# Altium PCB BikeTracker.PcbDoc
Units mm, origin at the board's own origin, x right, y up, seen from the top; angles counter-clockwise.
Board outline 53.09 x 65.02 mm, 4 copper layers (Top Layer, Inner Layer 1, Inner Layer 2, Bottom Layer), stack 1.564 mm thick; 30 components, 31 nets, 177 pads, 71 vias.
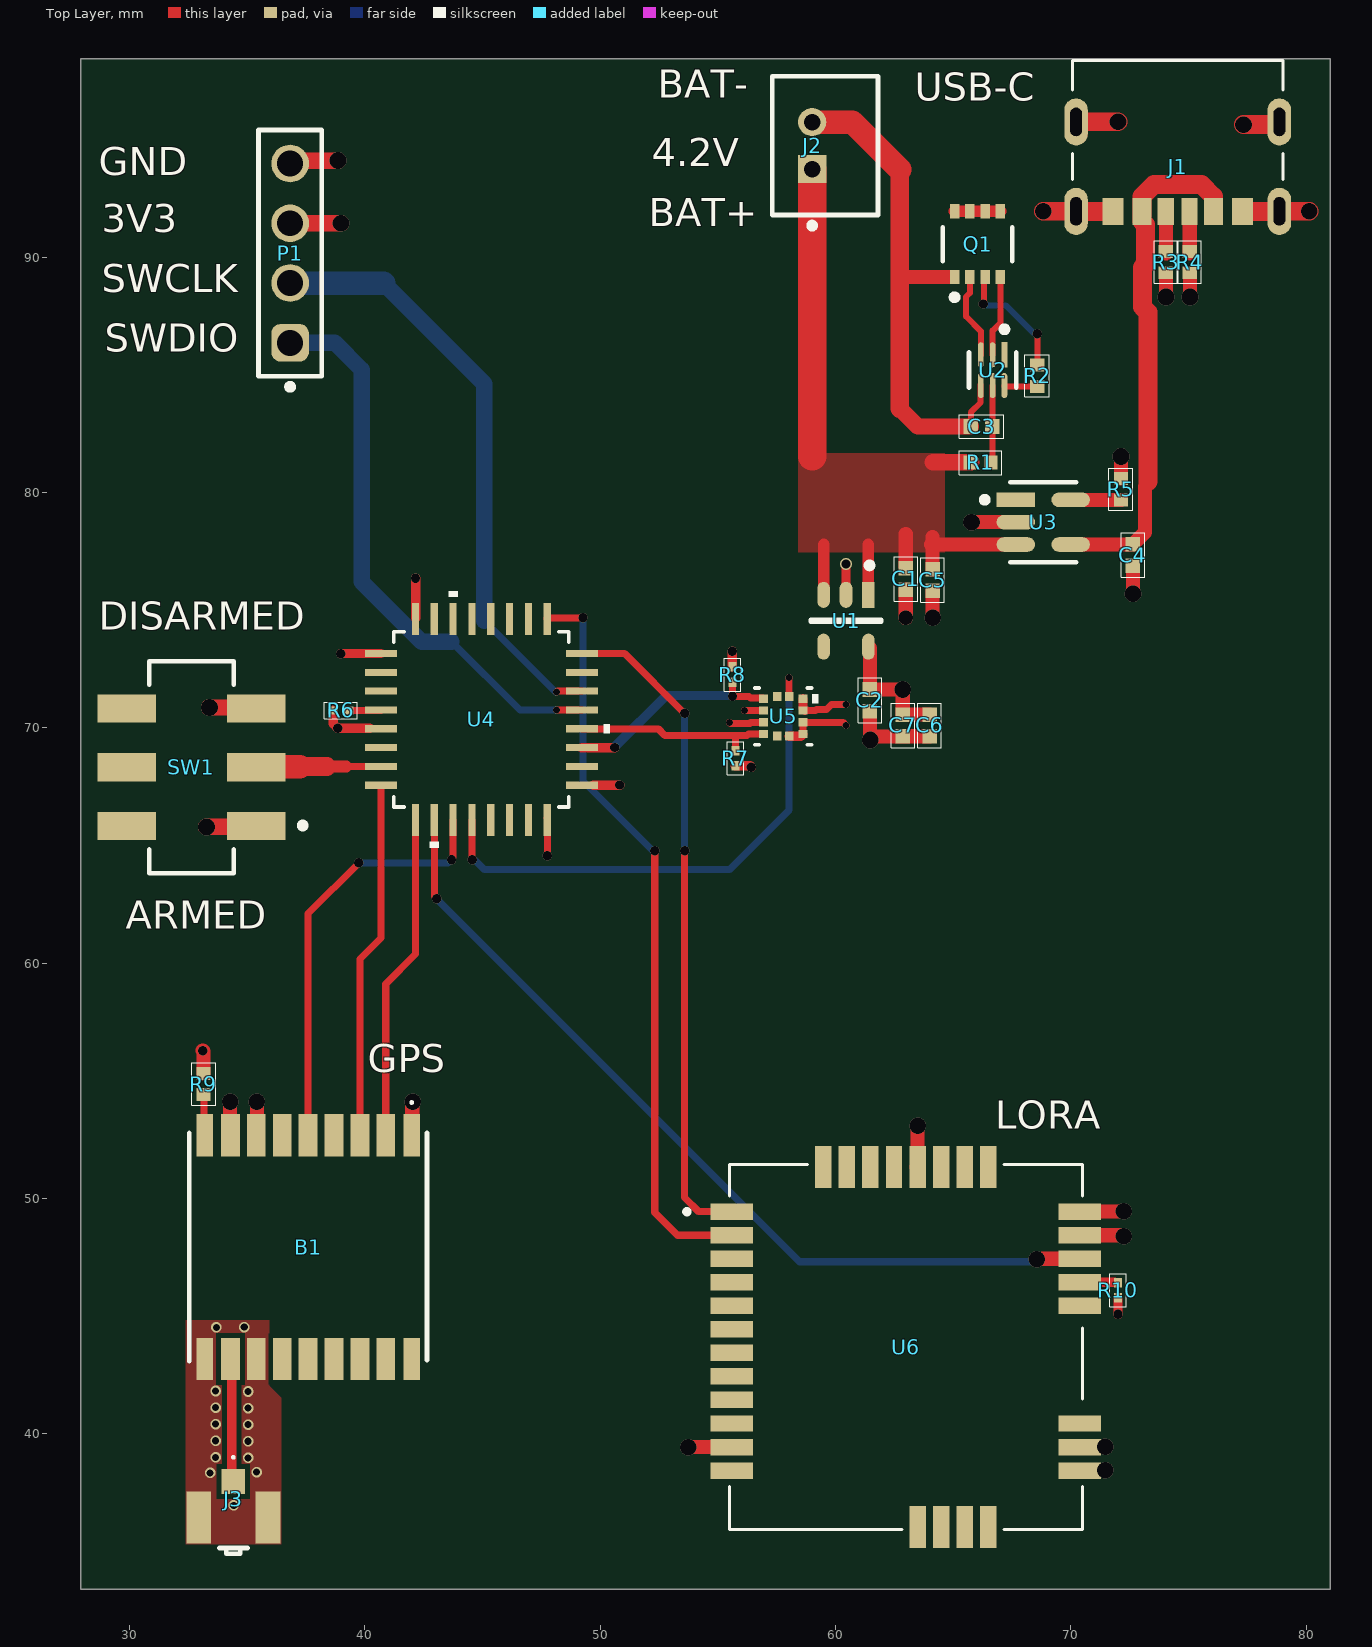
[diagram p0: Top Layer view]
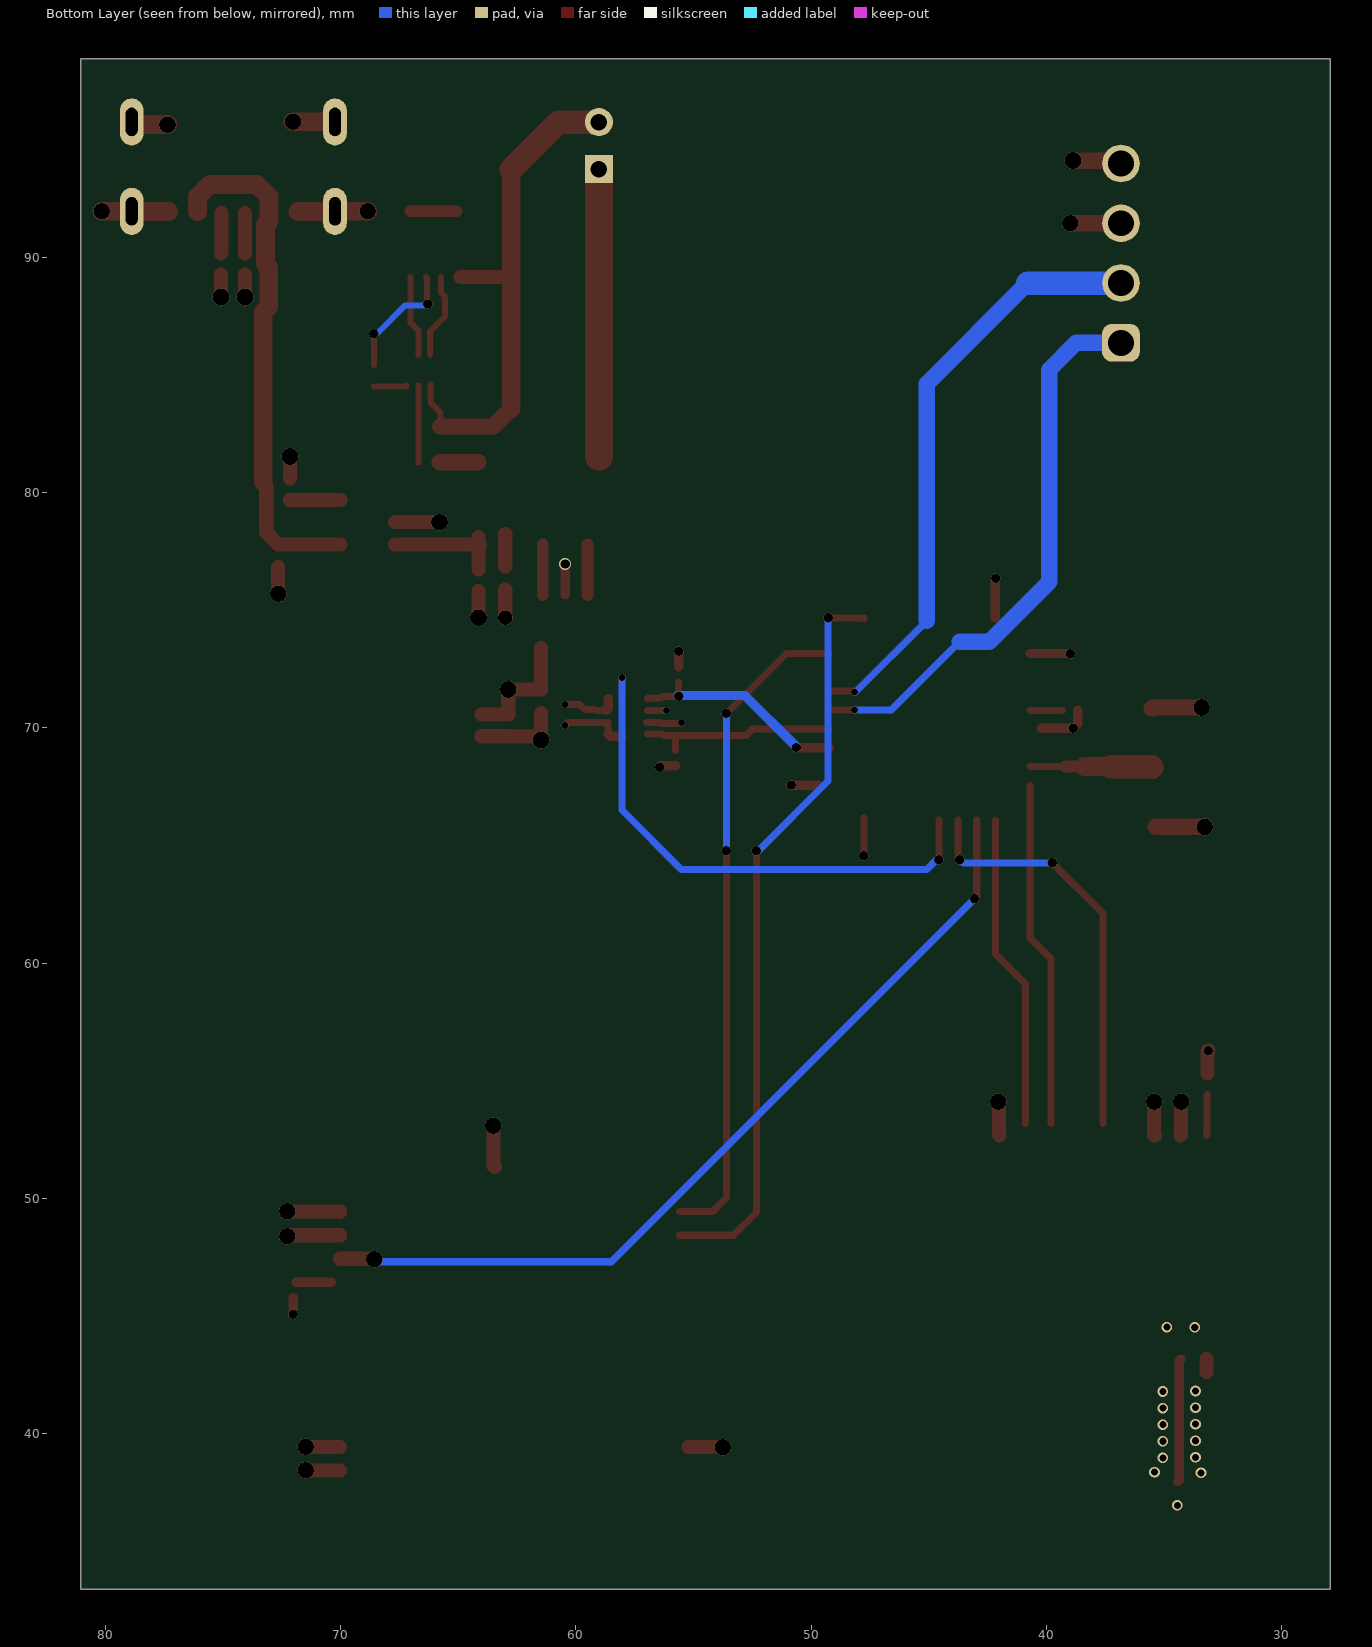
[diagram p1: Bottom Layer view, seen from below]
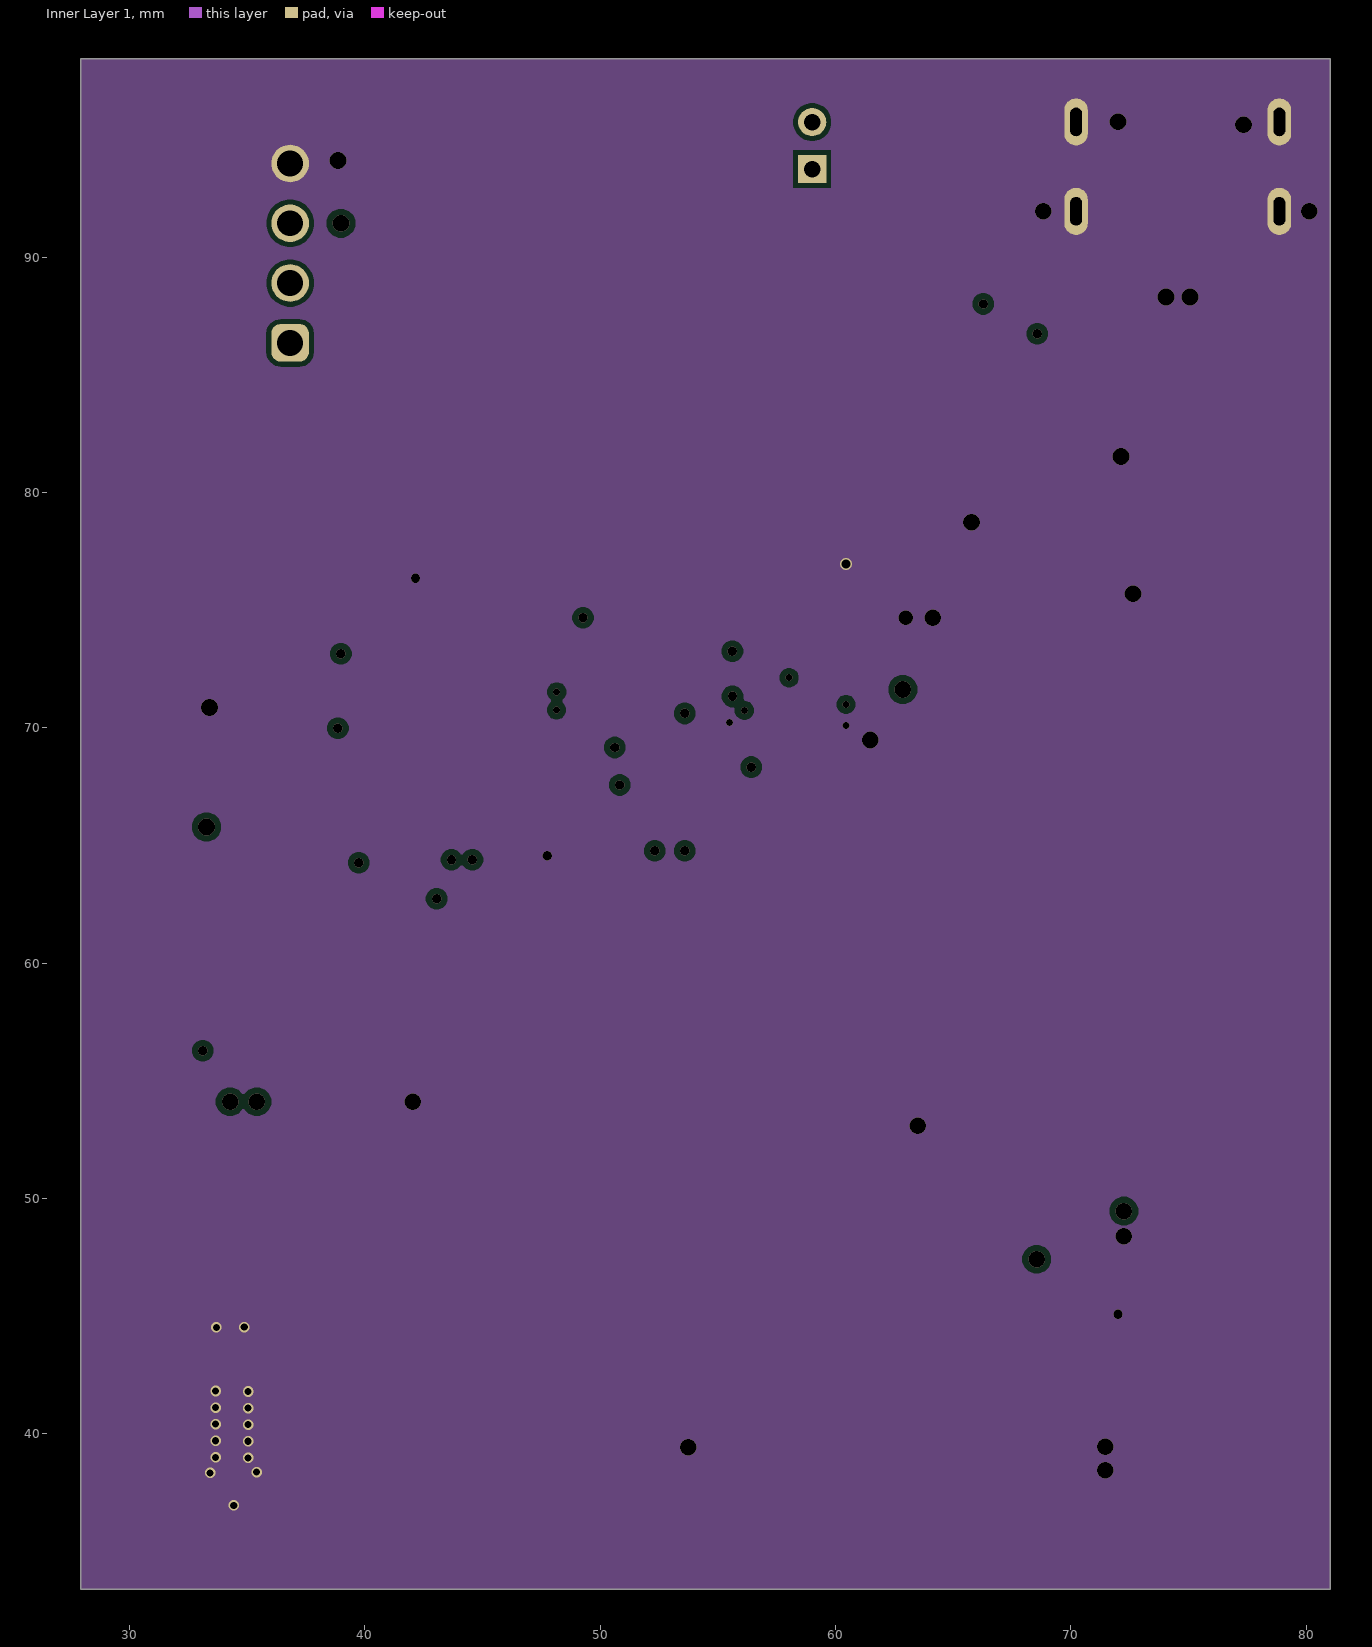
[diagram p2: Inner Layer 1]
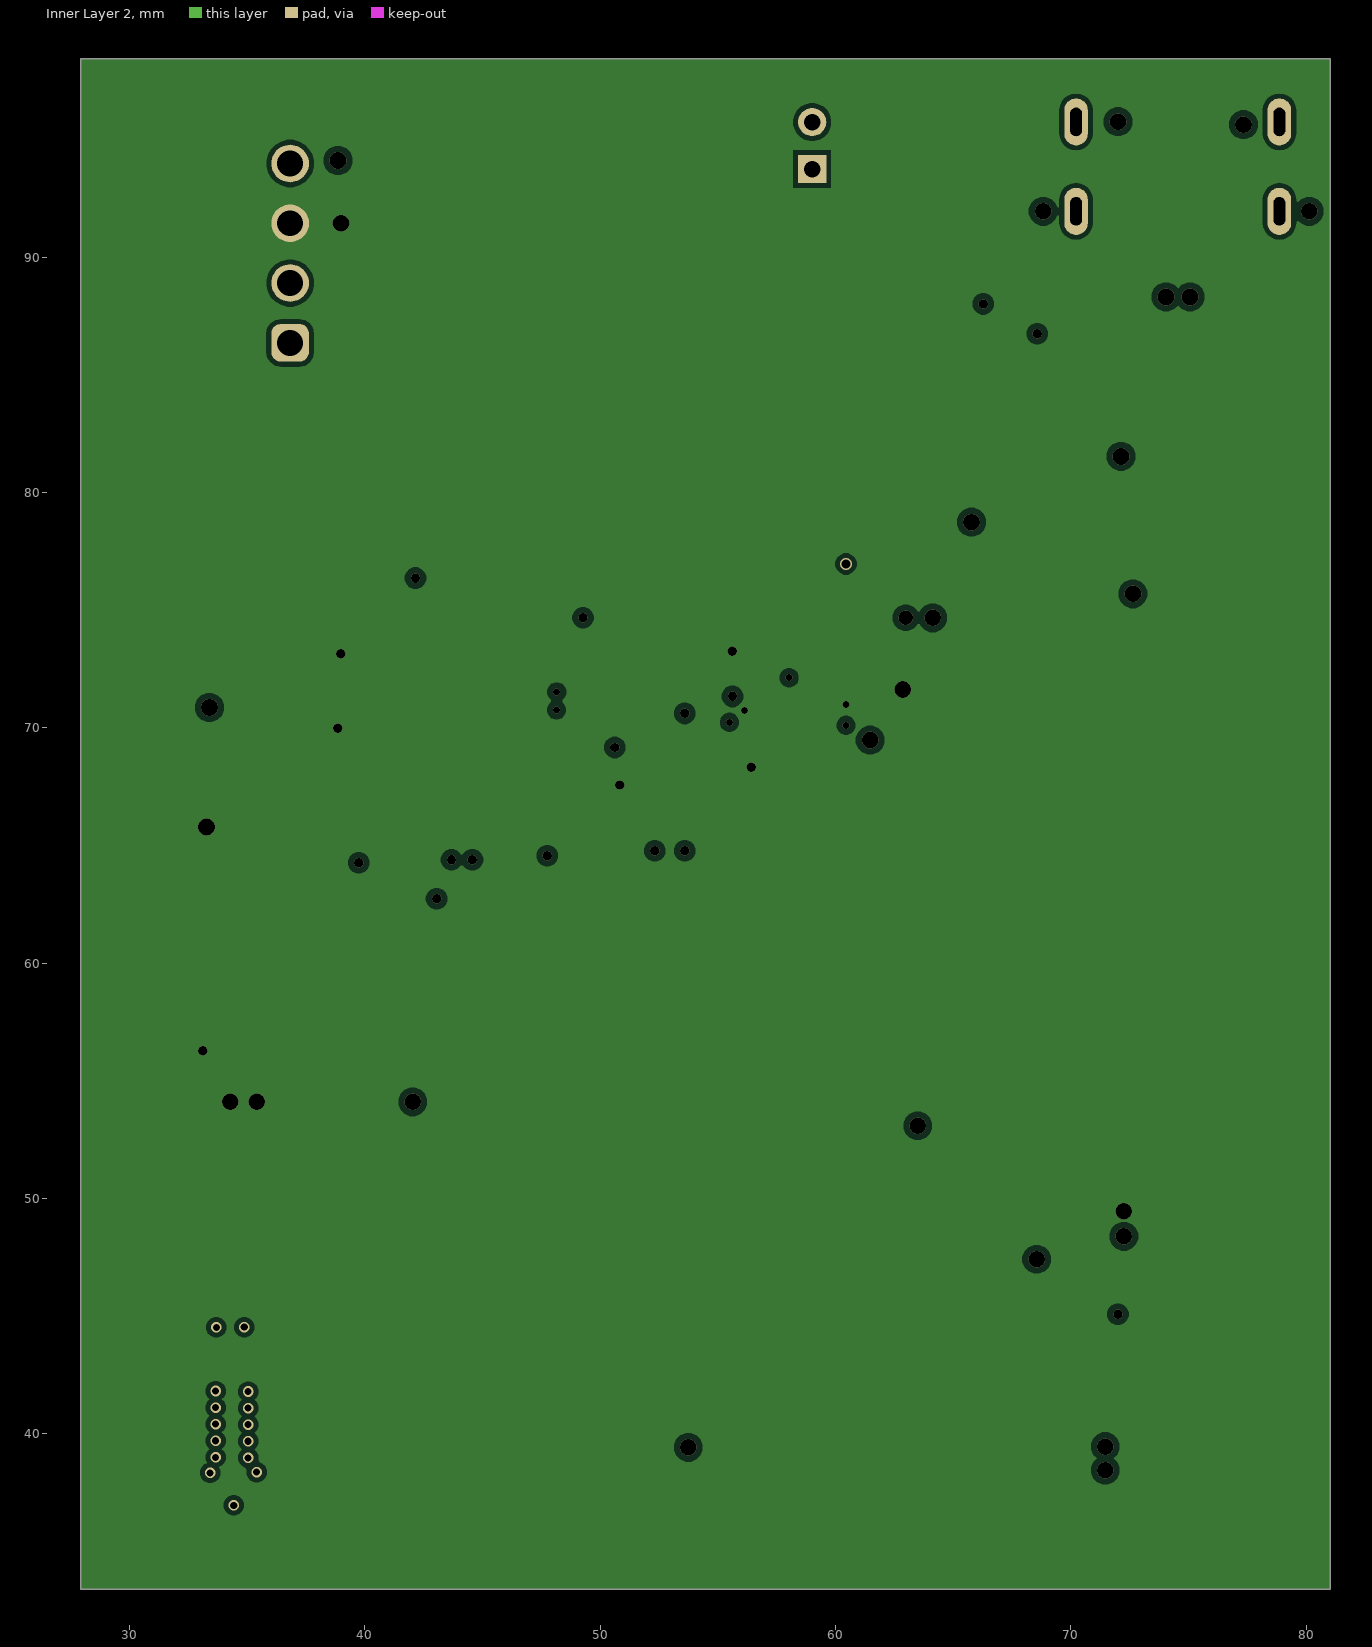
[diagram p3: Inner Layer 2]
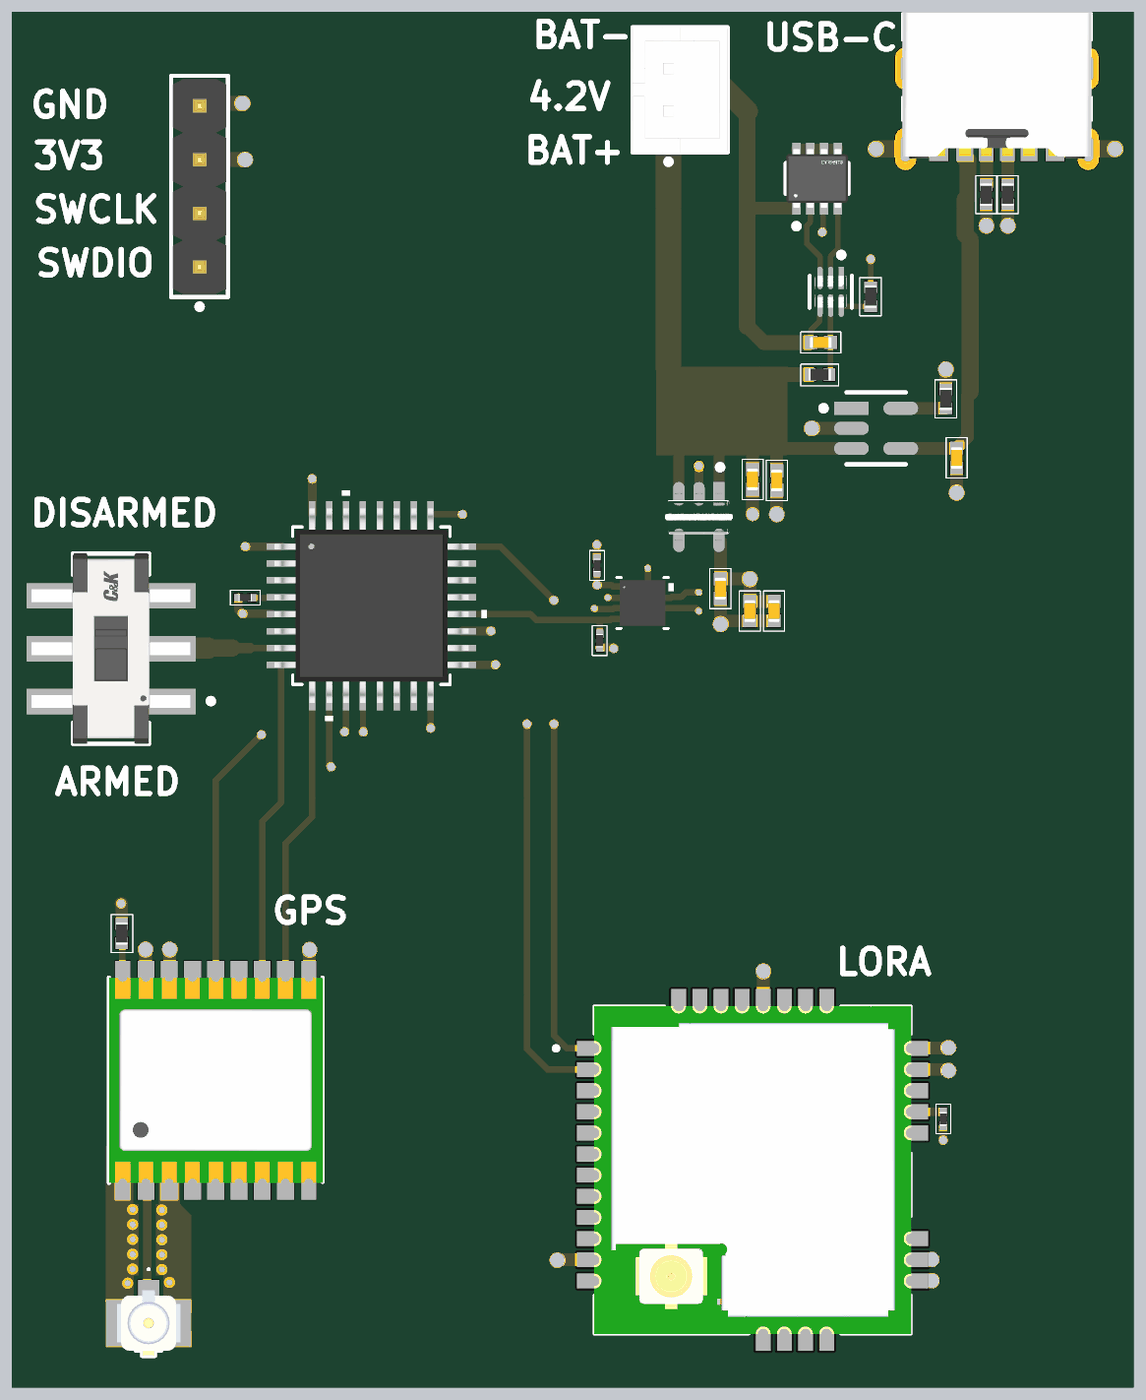
[diagram p4: 3D render of the assembled board from above, using the file's embedded part models]

## Layer stack, top to bottom
Top Solder: solder mask 0.0152, Solder Resist, Dk 3.8
Top Layer: signal copper 0.035
Prepeg 1: prepreg 0.0994, PP-015, Dk 4.1
Inner Layer 1: signal copper 0.0152
Core: core 1.265, FR-4, Dk 4.6
Inner Layer 2: signal copper 0.0152
Prepeg 2: prepreg 0.0994, PP-015, Dk 4.1
Bottom Layer: signal copper 0.035
Bottom Solder: solder mask 0.0152, Solder Resist, Dk 3.8

## Board outline
27.94,33.401 81.026,33.401 81.026,98.425 27.94,98.425

## Design rules (kind name [scope] priority, off if disabled: settings)
Clearance "Stitching No Net" [IsStitchingVia and InNet('No Net') vs (IsVia and (Not IsStitchingVia)) Or IsPad] p1: gap=0.127 ignorepadtopadclearanceinfootprint=FALSE
Clearance [All] p2: gap=0.2 ignorepadtopadclearanceinfootprint=TRUE except(0.102: Arc-Text Track-Text SMDPad-Text THPad-Text Fill-Text Poly-Text Region-Text Text-Text; 0.114: Arc-Arc Arc-Track Arc-SMDPad Arc-Via Track-Track Track-SMDPad Track-Via; 0.127: Via-Text; 0.152: Arc-THPad Track-THPad SMDPad-SMDPad SMDPad-THPad SMDPad-Via THPad-THPad THPad-Via Via-Via; 0.25: Arc-Hole Track-Hole SMDPad-Hole THPad-Hole Via-Hole Fill-Hole Poly-Hole Region-Hole Text-Hole)
ComponentClearance [All] p1: gap=0 collisioncheckmode=3 verticalgap=0 showdistances=FALSE
DiffPairsRouting DIFF90 [InDifferentialPairClass('All Differential Pairs')] p1: maxlimit=0.254 minlimit=0.15 mostfreqgap=0.254 toplayer_maxgap=0.15 toplayer_prefgap=0.15 toplayer_minwidth=0.141 toplayer_maxwidth=0.141 toplayer_prefwidth=0.141 midlayer1_minwidth=0.381 midlayer1_maxwidth=0.381 midlayer1_prefwidth=0.381 midlayer2_mingap=0.25 midlayer2_maxgap=0.25 midlayer2_prefgap=0.25 midlayer2_minwidth=0.139 midlayer2_maxwidth=0.139 midlayer2_prefwidth=0.139 bottomlayer_maxgap=0.15 bottomlayer_prefgap=0.15 bottomlayer_minwidth=0.137 bottomlayer_maxwidth=0.137 bottomlayer_prefwidth=0.137 impedanceprofiledriven=TRUE impedanceprofileid={235DA661-18AF-4E37-B827-B8E0859B5AF9} maxuncoupledlength=12.7
HoleSize [All] p1: absolutevalues=TRUE maxlimit=6.3 minlimit=0.2 maxpercent=80.000 minpercent=20.000
MinimumSolderMaskSliver [All] p1: minsoldermaskwidth=0.08
PlaneConnect [All] p1: pad.planeconnectstyle=Relief pad.reliefexpansion=0.508 pad.reliefentries=4 pad.reliefconductorwidth=0.508 pad.reliefairgap=0.254 via.planeconnectstyle=Direct via.reliefexpansion=0.508 via.reliefentries=4 via.reliefconductorwidth=0.508 via.reliefairgap=0.254
PolygonConnect [All] p1: connectstyle=Direct reliefconductorwidth=0.254 reliefentries=4 polygonreliefangle="90 Angle" airgapwidth=0.254
RoutingVias "General Vias" [All] p1: holewidth=0.2 width=0.45 viastyle="Through Hole" minholewidth=0.2 minwidth=0.45 maxholewidth=0.5 maxwidth=6.3
SilkToSilkClearance [All] p1: silktosilkclearance=0.15
SilkToSolderMaskClearance [IsPad] p1: minsilkscreentomaskgap=0.14 clearancetoexposedcopper=TRUE
SolderMaskExpansion [All] p1: expansion=0.038 istentingtop=FALSE
SupplyNets "Schematic Supply Nets" [InNet('GND')] p1: voltage=0.000
UnRoutedNet [All] p1: checkbadconnections=TRUE
Width [All] p1: maxlimit=5 minlimit=0.1 preferedwidth=0.25
22 further rules are at their usual default settings.

## Classes and differential pairs
component class MCU_and_Acc: P1 R6 R7 R8 SW1 U4 U5
net class RF: RF_GPS RF_LORAWAN
component class "Power Subsystem": C1 C2 C3 C4 C5 J1 J2 Q1 R1 R2 R3 R4 R5 U1 U2 U3
component class GPS_LoraWAN: B1 C6 C7 J3 R9 R10 U6

## Components (designator, comment, footprint, x,y, rotation, side; value= is the part's Value field where it differs from the comment)
B1 "MAX-M10M-00B" MAXM10M00B 37.594,47.93 r90 top
C1 "1 uF, X7R" CAP_0402 62.992,76.327 r90 top
C2 "1 uF, X7R" CAP_0402 61.468,71.168 r90 top
C3 "0.1 uF, X7R" CAP_0402 66.215,82.804 r0 top
C4 "4.7 uF, X7R" CAP_0402 72.644,77.343 r90 top
C5 "4.7 uF, X7R" CAP_0402 64.135,76.279 r90 top
C6 "100 nF, X7R" CAP_0402 64.008,70.104 r90 top
C7 "1 uF, X7R" CAP_0402 62.865,70.104 r90 top
J1 "UJC-HP-3-SMT-TR" CUI_UJC-HP-3-SMT-TR 74.549,91.948 r180 top
J2 "B2B-PH-K(LF)(SN)" FP-B2B-PH-K_LF_SN-MFG 59.563,94.742 r270 top
J3 "U.FL-R-SMT_10_" UFLRSMT10 34.417,36.449 r180 top
P1 "61300411121" 61300411121 36.83,90.17 r90 top
Q1 "ECH8695R-TL-W" FP-318BF-MFG 66.04,90.551 r90 top
R1 "330 Ω" RES_0402 66.167,81.28 r0 top
R2 "2.2 kΩ" RES_0402 68.58,84.963 r270 top
R3 "5.1 kΩ" RES_0402 74.041,89.789 r90 top
R4 "5.1 kΩ" RES_0402 75.057,89.789 r270 top
R5 "2 kΩ" RES_0402 72.136,80.137 r270 top
R6 "10 kΩ" RES_0201 38.989,70.739 r0 top
R7 "10 kΩ" RES_0201 55.753,68.707 r270 top
R8 "10 kΩ" RES_0201 55.626,72.263 r90 top
R9 "10 kΩ" RES_0402 33.147,54.864 r90 top
R10 "10 kΩ" RES_0201 72.009,46.101 r270 top
SW1 "JS202011SCQN" FP-JS202011SCQN-MFG 32.639,68.326 r90 top
U1 "AP2112K-3.3TRG1" FP-SOT25-IPC_C 60.452,74.549 r270 top
U2 "BQ29701DSER" FP-DSE0006A-IPC_A 66.683,85.198 r270 top
U3 "MCP73831T-2ACI/OT" FP-C04-091-OT-IPC_A 68.834,78.74 r0 top
U4 "STM32L011K4T6" LQFP32_7X7X1P4 44.958,70.358 r0 top
U5 "LIS2DW12TR" LGA-12_2X2X0P7_STM 57.785,70.485 r0 top
U6 "RAK3172" XCVR_RAK3172 62.992,43.688 r0 top

## Footprints (in the part's own frame and the unit in brackets; to place one, negate y for a bottom-side part, rotate by r counter-clockwise, add the part's x,y. Pads: shape width x height; smd on the part's side, far side on the other; paste and mask are expansions set on the pad)
61300411121 [mm] "Pin Header, pitch 2.54 mm, THT, Vertical, single row, 4p"
  rrect50% 1.6x1.6 hole 1.1: 1(-3.81,0)
  round 1.6 hole 1.1: 2(-1.27,0) 3(1.27,0) 4(3.81,0)
  silkscreen extent -5.8,-1.35 5.23,1.35, body extent -5.08,-1.27 5.08,1.27, height 8.57
CAP_0402 [mm]
  rect 0.62x0.62 smd mask+0.05: 1(-0.46,0) 2(0.46,0)
  silkscreen extent -0.95,-0.5 0.95,0.5, body extent -0.53,-0.28 0.53,0.28, height 0.55
CUI_UJC-HP-3-SMT-TR [mm]
  rect 0.7x1.15 smd: A5(-0.5,0.005) B5(0.5,0.005)
  rect 0.8x1.15 smd: A9(1.52,0.005) B9(-1.52,0.005)
  rect 0.9x1.15 smd: A12(2.75,0.005) B12(-2.75,0.005)
  oval 1x2 hole 0.5 slot 1.2 at 90 deg: S1(-4.32,0) S2(4.32,0) S3(-4.32,-3.8) S4(4.32,-3.8)
  silkscreen extent -4.47,-6.4 4.47,-1.35, body extent -4.47,-6.44 4.47,0.46, height 3.3
FP-318BF-MFG [mm]
  rect 0.6x0.4 smd paste+0 mask+0: 1(-1.4,0.975) 2(-1.4,0.325) 3(-1.4,-0.325) 4(-1.4,-0.975) 5(1.4,-0.975) 6(1.4,-0.325) 7(1.4,0.325) 8(1.4,0.975)
  silkscreen extent -2.38,-1.48 0.72,1.48, body extent -1.8,-1.58 1.8,1.58, height 0.25
FP-B2B-PH-K_LF_SN-MFG [mm]
  rect 1.2x1.2 hole 0.7 paste-2539.97 mask+0: 1(1,-0.55)
  round 1.2 hole 0.7 paste-2539.97 mask+0: 2(-1,-0.55)
  silkscreen extent -2.95,-2.25 3.52,2.25, body extent -3.05,-2.35 3.05,2.35, height 0.25
FP-C04-091-OT-IPC_A [mil]
  rect 64.5x24.33 smd paste+0 mask+0: 1(-45.91,37.4)
  rrect100% 64.5x24.33 smd paste+0 mask+0: 2(-45.91,0) 3(-45.91,-37.4) 4(45.91,-37.4) 5(45.91,37.4)
  silkscreen extent -103,-67 55,67
FP-DSE0006A-IPC_A [mm]
  rect 1.065x0.242 smd paste+0 mask+0: 1(-0.654,0.5)
  rrect100% 1.065x0.242 smd paste+0 mask+0: 2(-0.654,0) 3(-0.654,-0.5) 4(0.654,-0.5) 5(0.654,0) 6(0.654,0.5)
  silkscreen extent -1.86,-1 0.75,1, body extent -1.69,-1.25 1.69,1.25, height 0.25
FP-JS202011SCQN-MFG [mm]
  rect 1.2x2.5 smd paste+0 mask+0: 1(-2.5,-2.75) 2(0,-2.75) 3(2.5,-2.75) 4(-2.5,2.75) 5(0,2.75) 6(2.5,2.75)
  silkscreen extent -4.5,-4.85 4.5,1.8, body extent -4.6,-4.1 4.6,4.1, height 0.25
FP-SOT25-IPC_C [mm]
  rect 1.107x0.536 smd paste+0 mask+0: 1(-1.101,0.95)
  rrect100% 1.107x0.536 smd paste+0 mask+0: 2(-1.101,0) 3(-1.101,-0.95) 4(1.101,-0.95) 5(1.101,0.95)
  silkscreen extent -2.48,-1.5 0.05,1.5, body extent -1.75,-1.6 1.75,1.6, height 0.25
LGA-12_2X2X0P7_STM [mil]
  rect 15x14 smd paste+0 mask+1.18: 1(-33,29.53) 2(-33,9.84) 3(-33,-9.84) 4(-33,-29.53) 7(33,-29.53) 8(33,-9.84) 9(33,9.84) 10(33,29.53)
  rect 14x15 smd paste+0 mask+1.18: 5(-9.84,-33) 6(9.84,-33) 11(9.84,33) 12(-9.84,33)
  silkscreen extent -48,-48 58,48, body extent -43,-43 43,43, height 28
LQFP32_7X7X1P4 [mm]
  rect 1.353x0.304 smd paste+0 mask+0: 1(-4.271,2.8) 2(-4.271,2) 3(-4.271,1.2) 4(-4.271,0.4) 5(-4.271,-0.4) 6(-4.271,-1.2) 7(-4.271,-2) 8(-4.271,-2.8) 17(4.271,-2.8) 18(4.271,-2) 19(4.271,-1.2) 20(4.271,-0.4) 21(4.271,0.4) 22(4.271,1.2) 23(4.271,2) 24(4.271,2.8)
  rect 0.304x1.353 smd paste+0 mask+0: 9(-2.8,-4.271) 10(-2,-4.271) 11(-1.2,-4.271) 12(-0.4,-4.271) 13(0.4,-4.271) 14(1.2,-4.271) 15(2,-4.271) 16(2.8,-4.271) 25(2.8,4.271) 26(2,4.271) 27(1.2,4.271) 28(0.4,4.271) 29(-0.4,4.271) 30(-1.2,4.271) 31(-2,4.271) 32(-2.8,4.271)
  silkscreen extent -3.72,-5.46 5.46,5.46, body extent -4.6,-4.6 4.6,4.6, height 1.6
MAXM10M00B [mm]
  rect 1.8x0.7 smd: 1(4.75,-4.4) 9(4.75,4.4) 10(-4.75,4.4) 18(-4.75,-4.4)
  rect 1.8x0.8 smd: 2(4.75,-3.3) 3(4.75,-2.2) 4(4.75,-1.1) 5(4.75,0) 6(4.75,1.1) 7(4.75,2.2) 8(4.75,3.3) 11(-4.75,3.3) 12(-4.75,2.2) 13(-4.75,1.1) 14(-4.75,0) 15(-4.75,-1.1) 16(-4.75,-2.2) 17(-4.75,-3.3)
  silkscreen extent -4.85,-5.05 6.2,5.05, body extent -4.85,-5.05 4.85,5.05, height 2.5
RES_0201 [mm]
  rect 0.4x0.35 smd mask+0.05: 1(-0.325,0) 2(0.325,0)
  silkscreen extent -0.7,-0.35 0.7,0.35, body extent -0.32,-0.17 0.32,0.17, height 0.26
RES_0402 [mm]
  rect 0.55x0.6 smd mask+0.05: 1(-0.45,0) 2(0.45,0)
  silkscreen extent -0.9,-0.53 0.9,0.5, body extent -0.53,-0.28 0.53,0.28, height 0.4
UFLRSMT10 [mm]
  rect 1x1.05 smd: 1(0,-1.525)
  rect 1.05x2.2 smd: 2(-1.475,0) 3(1.475,0)
  silkscreen extent -0.6,-2.6 0.6,1.55, body extent -1.5,-1.55 1.5,1.55, height 1.25
XCVR_RAK3172 [mm]
  rect 1.8x0.7 smd paste+0 mask+0.102: 1(-7.4,5.75) 2(-7.4,4.75) 3(-7.4,3.75) 4(-7.4,2.75) 5(-7.4,1.75) 6(-7.4,0.75) 7(-7.4,-0.25) 8(-7.4,-1.25) 9(-7.4,-2.25) 10(-7.4,-3.25) 11(-7.4,-4.25) 12(-7.4,-5.25) 17(7.4,-5.25) 18(7.4,-4.25) 19(7.4,-3.25) 20(7.4,1.75) 21(7.4,2.75) 22(7.4,3.75) 23(7.4,4.75) 24(7.4,5.75)
  rect 0.7x1.8 smd paste+0 mask+0.102: 13(0.5,-7.65) 14(1.5,-7.65) 15(2.5,-7.65) 16(3.5,-7.65) 25(3.5,7.65) 26(2.5,7.65) 27(1.5,7.65) 28(0.5,7.65) 29(-0.5,7.65) 30(-1.5,7.65) 31(-2.5,7.65) 32(-3.5,7.65)
  silkscreen extent -9.4,-7.75 7.5,7.75, body extent -7.5,-7.75 7.5,7.75, height 2.61

## Part data
B1: "GPS Modules u-blox M10 GNSS LCC module, firmware in ROM, crystal oscillator", Manufacturer 1=u-blox, Mouser Part Number=377-MAX-M10M-00B, Arrow Part Number=MAX-M10M-00B, Arrow Price/Stock=https://www.arrow.com/en/products/max-m10m-00b/u-blox?utm_currency=USD&region=nac, Datasheet Link=https://content.u-blox.com/sites/default/files/documents/MAX-M10M_IntegrationManual_UBX-22038241.pdf, Geometry.Height=2.7mm, Manufacturer Part Number 1=MAX-M10M-00B, Mouser Price/Stock=https://www.mouser.co.uk/ProductDetail/u-blox/MAX-M10M-00B?qs=A6eO%252BMLsxmQGh8%2FJ1ZmexA%3D%3D, Supplier 1=Mouser, Supplier Part Number 1=377-MAX-M10M-00B
C1: library part CAP_0402, "Multilayer Ceramic Capacitors MLCC - SMD/SMT 6.3V 1uF X7R 0402 10% HI CV", Capacitance="100 pF", LCSC Part Number=C106200, Manufacturer 1=YAGEO, Manufacturer Part Number 1=CC0402KRX7R5BB105, Supplier Part Number 1=603-CC402KRX7R5BB105, Tolerance=5%, Supplier 1=Mouser
C2: library part CAP_0402, "Multilayer Ceramic Capacitors MLCC - SMD/SMT 6.3V 1uF X7R 0402 10% HI CV", Capacitance="100 pF", LCSC Part Number=C106200, Manufacturer=YAGEO, Manufacturer Part Number=CC0402JRNPO9BN101, Tolerance=5%
C3: library part CAP_0402, "Multilayer Ceramic Capacitors MLCC - SMD/SMT 16 V 0.1uF X7R 0402 10%", Capacitance="100 pF", LCSC Part Number=C106200, Supplier Part Number 1=603-CC402KRX7R7BB104, Tolerance=5%, Supplier 1=Mouser
C4: library part CAP_0402, "Multilayer Ceramic Capacitor MLCC", Capacitance="100 pF", LCSC Part Number=C106200, Manufacturer 1=YAGEO, Manufacturer Part Number 1=CC1206KFX7R9BB475, Supplier Part Number 1=603-CC1206KFX7R9B475, Tolerance=5%, Supplier 1=Mouser
C5: library part CAP_0402, "Multilayer Ceramic Capacitor MLCC", Capacitance="100 pF", LCSC Part Number=C106200, Manufacturer=YAGEO, Manufacturer Part Number=CC0402JRNPO9BN101, Tolerance=5%
C6: library part CAP_0402, "Multilayer Ceramic Capacitors MLCC - SMD/SMT CAP", Capacitance="100 pF", LCSC Part Number=C106200, Supplier Part Number 1=581-0402X7R104KT2AT, Tolerance=5%, Supplier 1=Mouser
C7: library part CAP_0402, "Multilayer Ceramic Capacitors MLCC - SMD/SMT 6.3V 1uF X7R 0402 10% HI CV", Capacitance="100 pF", LCSC Part Number=C106200, Supplier Part Number 1=CC0402JRNPO9BN101, Tolerance=5%, Supplier 1=YAGEO
J1: "USB Connectors USB jack, C type, power only, 6 pin, horizonal, gold flash plating, surface mount, T&R", Manufacturer 1="Same Sky", Package=None, Supplier Part Number 1=490-UJC-HP-3-SMT-TR, Availability=Unavailable, Manufacturer Part Number 1=UJC-HP-3-SMT-TR, MP=UJC-HP-3-SMT-TR, Price=None, Supplier 1=Mouser
J2: library part CMP-17439-000674-1, "Connector Header Through Hole 2 position 0.079\" (2.00mm)", Color=Beige, Current Rating=2A, Insulation Resistance=1GR, Manufacturer 1="JST Commercial", Manufacturer Part Number 1=B2B-PH-K-S(LF)(SN), Max Operating Temperature=85°C, Min Operating Temperature=-25°C, Supplier Part Number 1=306-B2BPHKSLFSNPP, Voltage Rating=100V, Contact Material=Brass, Contact Plating=Tin, Gender=Male, Lead Free="Lead Free", Material=Polyamide, Mount="Through Hole", Number of Positions=2, Number of Rows=1, Pitch=2mm, Supplier 1=Mouser, Termination=Crimp
J3: "U.FL (UMCC) Connector Receptacle, Male Pin 50 Ohms Surface Mount Solder", Arrow Part Number=U.FL-R-SMT(10), Manufacturer 1=Hirose, Supplier Part Number 1=798-U.FL-R-SMT10, Arrow Price/Stock=https://www.arrow.com/en/products/u.fl-r-smt-10/hirose-electric?utm_currency=USD&region=nac, Datasheet Link=https://eu.mouser.com/datasheet/2/185/hiros05388_1-2269186.pdf, Geometry.Height=1.45mm, Manufacturer Part Number 1=U.FL-R-SMT(10), Mouser Price/Stock=https://www.mouser.co.uk/ProductDetail/Hirose-Connector/U.FL-R-SMT10?qs=Ux3WWAnHpjBT1CWD8UMEMQ%3D%3D, Supplier 1=Mouser
P1: library part CMP-1502-01064-4, "THT Vertical Pin Header WR-PHD, Pitch 2.54 mm, Single Row, 4 pins", Color=Black, Contact Resistance=20mΩ, Current Rating=3A, Manufacturer 1="Würth Elektronik", Max Operating Temperature=105°C, Min Operating Temperature=-40°C, Operating Supply Voltage=250V, Supplier Part Number 1=710-61300411121, Connector Type="Male Pin", Contact Material=Gold, Contact Mating Length=5.9944mm, Contact Plating=Gold, Gender=Male, Height=8.89mm, Lead Free="Lead Free", Lead Pitch=2.54mm, Manufacturer Part Number 1=61300411121, Mount="Through Hole", Number of Contacts=4, Number of Pins=4, Number of Positions=4, Number of Rows=1, Orientation=Vertical, Packaging=Bulk, Pitch=2.54mm, RoHS=Compliant, Supplier 1=Mouser, Termination=Solder, Voltage Rating=250V
Q1: library part CMP-00278-51167104-1, "ECH8695R-TL-W Dual N-Channel Power MOSFET, 24V, 11 A, 9.1 mΩ", Case/Package=SMD/SMT, Continuous Drain Current (ID)=11A, Drain to Source Breakdown Voltage=24V, Drain to Source Resistance=7mΩ, Gate to Source Voltage (Vgs)=12.5V, Manufacturer 1=onsemi, Manufacturer Lifecycle Status=ACTIVE, Max Junction Temperature (Tj)=150°C, Max Power Dissipation=1.4W, Min Operating Temperature=-55°C, Power Dissipation=1.5W, Supplier Part Number 1=863-ECH8695R-TL-W, Contact Plating=Tin, Drain to Source Voltage (Vdss)=24V, Element Configuration=Dual, Fall Time=22.3µs, Height=950µm, Lead Free="Lead Free", Length=2.9mm, Lifecycle Status=Production, Manufacturer Part Number 1=ECH8695R-TL-W, Max Operating Temperature=150°C, Mount="Surface Mount", NexarPartId=51167104, Number of Channels=2, Number of Pins=8, Rds On Max=9.1mΩ, Rise Time=320ns, RoHS=Compliant, Schedule B="8541290080, 8541290080|8541290080, 8541290080|8541290080|8541290080, 8541290080|8541290080|8541290080|8541290080", Supplier 1=Mouser, Turn-Off Delay Time=19.7µs, Turn-On Delay Time=300ns, Width=2.3mm
R1 R2 R3 R4 R5 R9: library part RES_0402, "Resistor SMD 0402 Generic", LCSC Part Number=C93947, Manufacturer=YAGEO, Manufacturer Part Number=RC0402FR07150KL, Resistance="150 kOhm", Tolerance=1%
R6 R7 R8 R10: library part RES_0201, "Thick Film Resistors - SMD 0201 10K0 1% Lead Free", LCSC Part Number=C852221, Resistance="200 Ohm", Supplier Part Number 1=791-WR02X1002FAR, Tolerance=0.1%, Supplier 1=Mouser
SW1: library part CMP-2000-05087-3, "SWITCH SLIDE DPDT 300MA 6V", Actuator Color=Black, Contact Current Rating=300mA, Contact Resistance=70mR, Flammability Rating="UL94 V-2", Manufacturer 1=C&K, Max Operating Temperature=85°C, Max Voltage Rating (DC)=6V, Min Operating Temperature=-20°C, Package Quantity=1, Supplier Part Number 1=611-JS202011SCQN, Actuator Length=2mm, Actuator Material=Nylon, Actuator Type=Standard, Contact Material="Copper Alloy", Contact Plating=Silver, Current Rating=300mA, Depth=7.5mm, Electrical Life=5000Cycles, Housing Material=Nylon, Lead Free="Lead Free", Length=9mm, Manufacturer Part Number 1=JS202011SCQN, Max Current Rating=300mA, Mount="Surface Mount", Orientation=Vertical, Packaging="Tape and Reel", Radiation Hardening=No, REACH SVHC="No SVHC", Series=JS, Supplier 1=Mouser, Supplier Subtotal 1=0,8, Supplier Unit Price 1=0,8, Switch Function=On-On, Switch Travel=2mm, Termination="Gull Wing", Throw Configuration=DPDT, Voltage Rating (DC)=6V
U1: library part CMP-12756-000035-1, "IC REG LINEAR 3.3V 600MA SOT25", Case/Package=SOT-23-5, Dropout Voltage=250mV, Manufacturer 1="Diodes Incorporated", Max Input Voltage=6V, Max Operating Temperature=85°C, Max Output Current=600mA, Min Input Voltage=2.5V, Min Operating Temperature=-40°C, Output Voltage=3.3V, Package Quantity=1, Quiescent Current=55uA, Supplier Part Number 1=621-AP2112K-3.3TRG1, Accuracy=1.5%, Height=1.3mm, Lead Free="Lead Free", Length=3.1mm, Manufacturer Part Number 1=AP2112K-3.3TRG1, Mount="Surface Mount", Number of Outputs=1, Number of Pins=5, Number of Regulators=1, Output Current=600mA, Output Type=Fixed, Packaging="Tape and Reel", Polarity=Positive, Supplier 1=Mouser, Supplier Unit Price 1=3.66, Width=1.7mm
U2: library part CMP-04911-000034-1, "IC LITHIUM BATT PROTECT 6-SON", Case/Package=WFDFN, Manufacturer 1="Texas Instruments", Max Operating Temperature=85°C, Min Operating Temperature=-40°C, Operating Supply Voltage=28V, Supplier Part Number 1=595-BQ29701DSER, Contact Plating=Gold, Fault Protection="Over Current", Lead Free="Lead Free", Manufacturer Part Number 1=BQ29701DSER, Mount="Surface Mount", Number of Cells=1, Number of Pins=6, Packaging="Tape and Reel", RoHS Compliant=Yes, Supplier 1=Mouser
U3: library part CMP-0133-00143-2, "IC CONTROLLR LI-ION 4.2V SOT23-5", Case/Package=SOT-23, Drain to Source Resistance=350mR, Manufacturer 1="Microchip Technology", Max Charge Current=500mA, Max Input Voltage=6V, Max Operating Temperature=85°C, Max Output Voltage=4.5V, Max Power Dissipation=1.54W, Min Operating Temperature=-40°C, Min Output Voltage=4.168V, Min Supply Voltage=3.75V, Output Voltage=4.2V, Supplier Part Number 1=579-MCP73831T-2ACIOT, Voltage Rating=4.534V, Contact Plating=Tin, Height=0.051inch, Lead Free="Lead Free", Length=0.122inch, Manufacturer Part Number 1=MCP73831T-2ACI/OT, Max Supply Voltage=6V, Mount="Surface Mount", Number of Cells=1, Number of Channels=1, Number of Outputs=1, Number of Pins=5, Output Current=500mA, Packaging="Tape and Reel", Radiation Hardening=No, REACH SVHC="No SVHC", Supplier 1=Mouser, Termination=SMD/SMT, Weight=0.00709oz, Width=0.071inch
U4: "Ultra-low-power Arm Cortex-M0+ MCU with 16-Kbytes of Flash memory, 32 MHz CPU", Manufacturer 1=STMicroelectronics, Supplier Part Number 1=511-STM32L011K4T6, Copyright="Copyright (C) 2026 Ultra Librarian. All rights reserved.", Datasheet=https://www.st.com/resource/en/datasheet/stm32l011d4.pdf, Manufacturer Part Number 1=STM32L011K4T6, Manufacturer_Name=STMicroelectronics, Manufacturer_Part_Number=STM32L011K4T6, RefDes=RefDes, Supplier 1=Mouser, Type=Type
U5: "MEMS digital output motion sensor: high-performance ultralow-power 3-axis &#34;femto&#34; accelerometer", Manufacturer_Name=STMicroelectronics, Copyright="Copyright (C) 2026 Ultra Librarian. All rights reserved.", Manufacturer_Part_Number=LIS2DW12TR, RefDes=RefDes, Type=Type
U6: "Low-power, long-range transceiver module based on the STM32WLE5CC", Manufacturer 1=RAK, Manufacturer Part Number 1=RAK3172, Supplier 1=RAK, Supplier Part Number 1=RAK3172, Supplier Subtotal 1=5,99, Supplier Unit Price 1=5,99

## Via types
v1: diameter 0.4, hole 0.4, Top Layer to Bottom Layer, 21 vias
v2: diameter 0.711, hole 0.711, Top Layer to Bottom Layer, 16 vias
v3: diameter 0.45, hole 0.3, Top Layer to Bottom Layer, 15 vias
v4: diameter 0.7, hole 0.7, Top Layer to Bottom Layer, 10 vias
v5: diameter 0.3, hole 0.3, Top Layer to Bottom Layer, 7 vias
v6: diameter 0.5, hole 0.4, Top Layer to Bottom Layer, 1 vias
v7: diameter 0.6, hole 0.6, Top Layer to Bottom Layer, 1 vias

## Nets (pads, with @x,y where several pads share a name; then routed paths per layer and width w, separated by ;. In a path a pad name is that pad's centre, name@x,y a point inside that pad or via, vN(x,y) a via of type N, cw(c..) or ccw(c..) an arc to the next point about the centre after c; other vN are vias at no path point)
3V3: B1.7 B1.8 C2.2 C6.2 C7.2 P1.3 R6.1 R7.2 R8.2 R9.2 SW1.1 U1.5 U4.1 U4.5 U4.17 U5.2 U5.9 U5.10 U6.24 | length 25.6
  Top Layer w0.3: v5(56.134,70.739) 56.138,70.735 U5.2 ; U5.9@58.717,70.739 59.148,70.739 59.19,70.781 59.621,70.781 59.833,70.993 v5(60.452,70.993)
  Top Layer w0.4: P1.3@36.576,91.567 P1.3@36.643,91.5 ; R6.1 38.664,70.175 v1(38.862,69.977) U4.5@40.211,69.977 ; v1@38.995,73.158 U4.1 ; U4.17@49.705,67.564 50.832,67.564 v1(50.838,67.57) ; R8.2 v1(55.626,73.248) ; R7.2 56.376,68.382 v1(56.426,68.332) ; U5.10 58.623,70.833 U5.9@58.717,70.739
  Top Layer w0.6: v1(33.119,56.284) 33.147,56.257 R9.2 ; v4(34.276,54.116) 34.276,52.698 B1.8 ; B1.7 35.419,52.705 v4(35.419,54.116) ; U1.5@61.468,73.382 C2.2 v2(62.865,71.628) C7.2 C6.2 ; U6.24@70.011,49.438 70.024,49.451 72.25,49.451 v4(72.263,49.464)
  Top Layer w0.7: v2(33.274,65.786) 33.276,65.788 35.347,65.788 SW1.1@35.349,65.786 ; P1.3@36.643,91.5 36.701,91.442 38.987,91.442 v2(38.989,91.44)
  other v1: 38.989,73.152
BAT_NEG: C3.1 J2.2 Q1.1 U2.4 | length 22.2
  Top Layer w0.254: 62.738,89.154 62.741,89.151 ; C3.1 65.755,83.408 66.167,83.82 U2.4@66.167,84.582
  Top Layer w0.6: 62.741,89.151 Q1.1@64.897,89.151
  Top Layer w0.7: 62.738,83.566 63.5,82.804 C3.1
  Top Layer w0.8: 62.738,83.566 62.738,89.154 62.738,93.726
  Top Layer w1: J2.2 60.722,95.742 62.738,93.726
BAT_RAW: C1.2 C5.2 J2.1 R1.1 U1.1 U1.3 U3.3 | length 24.5
  Top Layer w0.5: U1.3 59.502,77.79 ; U1.1 61.402,77.79
  Top Layer w0.6: C1.2@62.992,76.866 62.992,78.232 ; 64.069,77.79 U3.3 ; C5.2 64.135,78.105
  Top Layer w0.7: 64.135,81.28 R1.1@65.775,81.28
  Top Layer w1.2: 59.013,81.534 J2.1
BAT_SENSE: C3.2 R1.2 U2.5 | length 3.3
  Top Layer w0.254: R1.2@66.675,81.28 C3.2 66.683,82.812 U2.5
COUT_CTRL: Q1.4 U2.2 | length 3.4
  Top Layer w0.254: U2.2 66.683,86.876 67.015,87.208 Q1.4
DOUT_CTRL: Q1.2 U2.3 | length 3.6
  Top Layer w0.254: Q1.2 65.715,88.48 65.55,88.314 65.55,87.485 66.183,86.852 U2.3
EXTINT: B1.5 U4.11 | length 17.7
  Top Layer w0.3: B1.5@37.594,53.188 37.594,62.105 v1(39.751,64.262) ; v1(43.688,64.389) 43.688,64.416 43.758,64.486 U4.11
  Bottom Layer w0.3: v1@39.783,64.262 43.534,64.262 43.661,64.389 v1@43.693,64.389
GND: B1.1 B1.10 B1.12 C1.1 C2.1 C4.1 C5.1 C6.1 C7.1 J1.A12 J1.B12 J1.S1 J1.S2 J1.S3 J1.S4 J3.2 J3.3 P1.4 R3.1 R4.2 R5.1 R10.2 SW1.3 U1.2 U3.2 U4.16 U4.32 U5.3 U5.6 U5.7 U5.8 U6.11 U6.17 U6.18 U6.23 U6.28 | length 46
  Top Layer w0.3: U4.16@47.756,66.177 47.758,66.174 v1@47.758,64.571 ; v5(55.499,70.231) 55.541,70.189 56.362,70.189 56.404,70.231 U5.3@56.98,70.231 ; U5.7 U5.8 ; U5.8@58.75,70.235 60.321,70.235 v5(60.452,70.104)
  Top Layer w0.4: P1.4@36.451,94.232 P1.4@36.519,94.164 ; U4.32@42.164,74.666 v1@42.164,76.359 ; U5.6 58.535,69.647 U5.7 ; U1.2 v6(60.452,76.962) ; v1(72.009,45.085) R10.2
  Top Layer w0.6: B1.10@33.194,42.63 B1.10 ; B1.1 42.018,52.704 42.018,54.083 v4(42.037,54.102) ; v4@54.026,39.438 U6.11@55.211,39.438 ; C2.1@61.477,70.621 v2(61.477,69.478) 61.507,69.478 61.663,69.634 62.855,69.634 C7.1 C6.1 ; v7(62.992,74.676) C1.1 ; U6.28@63.442,51.338 63.496,51.392 63.496,53.082 v4(63.5,53.086) ; v2(64.135,74.676) C5.1 ; v2(65.786,78.74) U3.2 ; U6.17@70.011,38.438 U6.17@71.196,38.438 ; U6.18@70.011,39.438 U6.18@71.196,39.438 ; U6.23@70.011,48.438 72.185,48.438 72.236,48.387 v4(72.263,48.387) ; R5.1 v2(72.136,81.534) ; v2(72.644,75.692) C4.1@72.644,76.835 ; v2(74.053,88.311) R3.1@74.053,89.258 ; v2(75.069,88.311) R4.2@75.069,89.258
  Top Layer w0.7: v2(33.401,70.866) 33.403,70.864 35.478,70.864 SW1.3@35.516,70.826 ; P1.4@36.519,94.164 36.576,94.107 38.862,94.107 v2(38.864,94.105)
  Top Layer w0.8: v2(68.834,91.948) 70.219,91.948 J1.S2@70.229,91.938 ; J1.S2 70.232,91.945 71.797,91.945 J1.A12 ; J1.S4@70.321,95.748 70.321,95.21 70.321,95.758 v2(72.009,95.758) ; J1.B12 77.301,91.945 78.866,91.945 J1.S1 v2(80.137,91.948) ; v2(77.343,95.631) J1.S3@78.957,95.631
  other v1: 47.758,64.57 42.158,76.365
  other v3: 34.434,36.961 33.429,38.337 35.405,38.374 33.663,39.001 35.048,38.98 35.048,39.684 33.663,39.705 35.048,40.388 33.663,40.409 35.048,41.092 33.663,41.113 33.663,41.817 35.048,41.796 33.694,44.522 34.881,44.531
  other v4: 71.47,38.456 53.752,39.42 71.47,39.456
INT_ACC: U4.12 U5.11 | length 22.9
  Top Layer w0.3: U4.12 44.56,66.085 44.56,64.406 v1(44.577,64.389) ; v5(58.033,72.13) 58.033,71.325 U5.11
  Bottom Layer w0.3: v1@44.583,64.435 44.583,64.41 44.623,64.37 44.694,64.37 45.094,63.97 55.502,63.97 58.039,66.507 58.039,72.124 v5(58.033,72.13)
NetJ1_A5: J1.A5 R4.1 | length 1.7
  Top Layer w0.6: J1.A5@75.057,91.867 75.057,90.17 R4.1@75.069,90.158
NetJ1_B5: J1.B5 R3.2 | length 1.7
  Top Layer w0.6: R3.2@74.053,90.158 74.057,90.162 J1.B5@74.057,91.867
NetR2_2: R2.2 U2.6 | length 1.4
  Top Layer w0.254: U2.6 67.183,84.519 67.189,84.513 R2.2
NetR5_2: R5.2 U3.5 | length 2.1
  Top Layer w0.254: U3.5 U3.5@70.002,79.688 ; R5.2@72.134,79.561 R5.2@72.136,79.56
  Top Layer w0.6: U3.5@70.002,79.688 R5.2@72.134,79.688
NetR6_2: R6.2 U4.4 | length 1.4
  Top Layer w0.3: R6.2 U4.4@40.687,70.739
NetR10_1: R10.1 U6.21 | length 1.5
  Top Layer w0.4: U6.21 R10.1@71.878,46.438
PACK_NEG: Q1.3 R2.1 | length 5.3
  Top Layer w0.254: v1(66.282,88.011) 66.324,88.052 66.324,89.11 Q1.3 ; R2.1 v1(68.58,86.741)
  Bottom Layer w0.254: v1@66.23,87.973 66.24,87.983 66.414,87.983 66.442,87.955 67.239,87.955 68.425,86.769 68.513,86.769 v1@68.525,86.757
RF_GPS: B1.11 J3.1 | length 5.3
  Top Layer w0.4: B1.11 34.355,43.118 34.355,38.036 J3.1
RF_LORAWAN: U6.12
RST: B1.9 R9.1 | length 1.8
  Top Layer w0.3: R9.1 33.171,54.391 33.171,52.704 B1.9
RST_LORA: U4.10 U6.22 | length 36.2
  Top Layer w0.3: v1@42.958,62.833 U4.10
  Top Layer w0.6: v4@68.826,47.438 U6.22@70.011,47.438
  Bottom Layer w0.3: v1@43.035,62.756 58.48,47.311 68.335,47.311 68.367,47.343 68.374,47.343 v4@68.406,47.311
  other v1: 43.053,62.738
  other v4: 68.552,47.42
RX_GPS: B1.3 U4.8 | length 14.7
  Top Layer w0.3: B1.3@39.794,53.188 39.794,60.175 40.687,61.069 U4.8
RX_LORAWAN: U4.24 U6.1 | length 28.2
  Top Layer w0.3: U4.24 51.048,73.158 v1(53.594,70.612) ; v1(53.594,64.77) 53.594,50.038 54.194,49.438 U6.1
  Bottom Layer w0.3: v1(53.594,64.77) v1(53.594,70.612)
SCL: R8.1 U4.19 U5.1 | length 9.3
  Top Layer w0.3: R8.1 55.628,71.936 v1(55.628,71.333) 55.63,71.331 56.32,71.331 56.388,71.263 56.919,71.263 U5.1
  Top Layer w0.4: U4.19 v1@50.616,69.158
  Bottom Layer w0.4: v1@50.642,69.203 52.813,71.374 v1@55.646,71.374
  other v1: 50.622,69.164
SDA: R7.1 U4.20 U5.4 | length 8.5
  Top Layer w0.3: U4.20 52.475,69.958 52.752,69.681 55.753,69.681 ; R7.1 55.753,69.681 ; U5.4 56.306,69.735 56.252,69.681 55.753,69.681
SLIDE: SW1.2 U4.7 | length 5.2
  Top Layer w0.3: 39.211,68.358 U4.7
  Top Layer w0.5: 38.386,68.358 39.211,68.358
  Top Layer w0.8: 37.238,68.353 38.381,68.353 38.386,68.358
  Top Layer w1: SW1.2@35.516,68.326 35.543,68.353 37.238,68.353
SWCLK: P1.2 U4.22 | length 25.8
  Top Layer w0.3: v5(48.158,71.526) 48.188,71.556 U4.22 U4.22
  Bottom Layer w0.3: 45.085,74.545 48.104,71.526 v5(48.158,71.526)
  Bottom Layer w0.7: 40.798,88.9 45.085,84.613 45.085,74.545
  Bottom Layer w1: P1.2@36.576,88.9 P1.2 40.798,88.9
SWDIO: P1.1 U4.21 | length 24.1
  Top Layer w0.3: v5(48.15,70.756) U4.21 U4.21
  Bottom Layer w0.3: 43.688,73.66 46.592,70.756 v5(48.15,70.756)
  Bottom Layer w0.7: P1.1 38.735,86.36 39.878,85.217 39.878,76.2 42.418,73.66 43.688,73.66
TX_GPS: B1.2 U4.9 | length 13.4
  Top Layer w0.3: B1.2@40.894,53.188 40.894,59.118 42.158,60.382 U4.9
TX_LORAWAN: U4.25 U6.2 | length 31.8
  Top Layer w0.3: U4.25 47.758,74.674 47.76,74.676 v1(49.276,74.676) ; v1(52.324,64.77) 52.324,49.403 53.289,48.438 U6.2
  Bottom Layer w0.3: v1(49.276,74.676) 49.276,67.736 52.223,64.789 52.278,64.789 52.324,64.743 v1@52.324,64.724
USB_5V: C4.2 J1.A9 J1.B9 U3.4 | length 22
  Top Layer w0.254: U3.4 U3.4@70.007,77.796
  Top Layer w0.6: U3.4@70.007,77.796 C4.2@72.637,77.796 ; C4.2 73.152,78.311 73.152,80.264 73.279,80.468
  Top Layer w0.8: 73.279,80.468 73.279,87.663 73.047,87.894 73.047,89.567 73.185,89.705 73.185,91.378 73.029,91.534 73.029,92.575 73.545,93.091 75.553,93.091 76.069,92.575 J1.B9
VMID: Q1.5 Q1.6 Q1.7 Q1.8 | length 1.9
  Top Layer w0.5: Q1.8 Q1.5
pads on no net: B1.4 B1.6 B1.13 B1.14 B1.15 B1.16 B1.17 B1.18 SW1.4 SW1.5 SW1.6 U1.4 U2.1 U3.1 U4.2 U4.3 U4.6 U4.13 U4.14 U4.15 U4.18 U4.23 U4.26 U4.27 U4.28 U4.29 U4.30 U4.31 U5.5 U5.12 U6.3 U6.4 U6.5 U6.6 U6.7 U6.8 U6.9 U6.10 U6.13 U6.14 U6.15 U6.16 U6.19 U6.20 U6.25 U6.26 U6.27 U6.29 U6.30 U6.31 U6.32

## Polygon pours and split planes (outlines as drawn)
BAT_RAW on Top Layer "BAT_RAW_L01_P000" (solid, pour order 6): 58.42,81.661 58.42,77.47 64.643,77.47 64.643,77.724 64.643,81.661
GND on Top Layer "GND_L01_P007" (solid, pour order 7): 32.385,44.831 35.941,44.831 35.941,42.037 36.449,41.529 36.449,35.306 32.385,35.306
GND on Inner Layer 1 "GND_L02_P012" (solid, pour order 12): 27.94,33.401 81.026,33.401 81.026,98.425 27.94,98.425
3V3 on Inner Layer 2 "3V3_L03_P013" (solid, pour order 13): 27.94,33.401 81.026,33.401 81.026,98.425 27.94,98.425

## Silkscreen, mask and mechanical layers (free items; w line width, h text height)
Top Overlay:
  text "BAT-" at 52.451,96.774 h1.2
  text "USB-C" at 63.373,96.647 h1.2
  text "4.2V" at 52.197,93.853 h1.2
  text "GND" at 28.702,93.472 h1.2
  text "BAT+" at 52.07,91.313 h1.2
  text "3V3" at 28.829,91.059 h1.2
  text "SWCLK" at 28.829,88.519 h1.2
  text "SWDIO" at 28.956,85.979 h1.2
  text "DISARMED" at 28.702,74.168 h1.2
  text "ARMED" at 29.845,61.468 h1.2
  text "GPS" at 40.132,55.372 h1.2
  text "LORA" at 66.802,52.959 h1.2

## Text inside footprints (layer, text, board x,y; h text height)
U4: Mechanical 13 "*" at 41.427,72.923 h1.27
U5: Mechanical 13 "*" at 56.769,70.85 h1.27